# Altium PCB PCB1.PcbDoc
Units mm, origin at the board's own origin, x right, y up, seen from the top; angles counter-clockwise.
Board outline 122.05 x 129.79 mm, 2 copper layers (Top Layer, Bottom Layer); 66 components, 56 nets, 261 pads, 4 vias.
Unrouted connection lines stored in the file: 6.
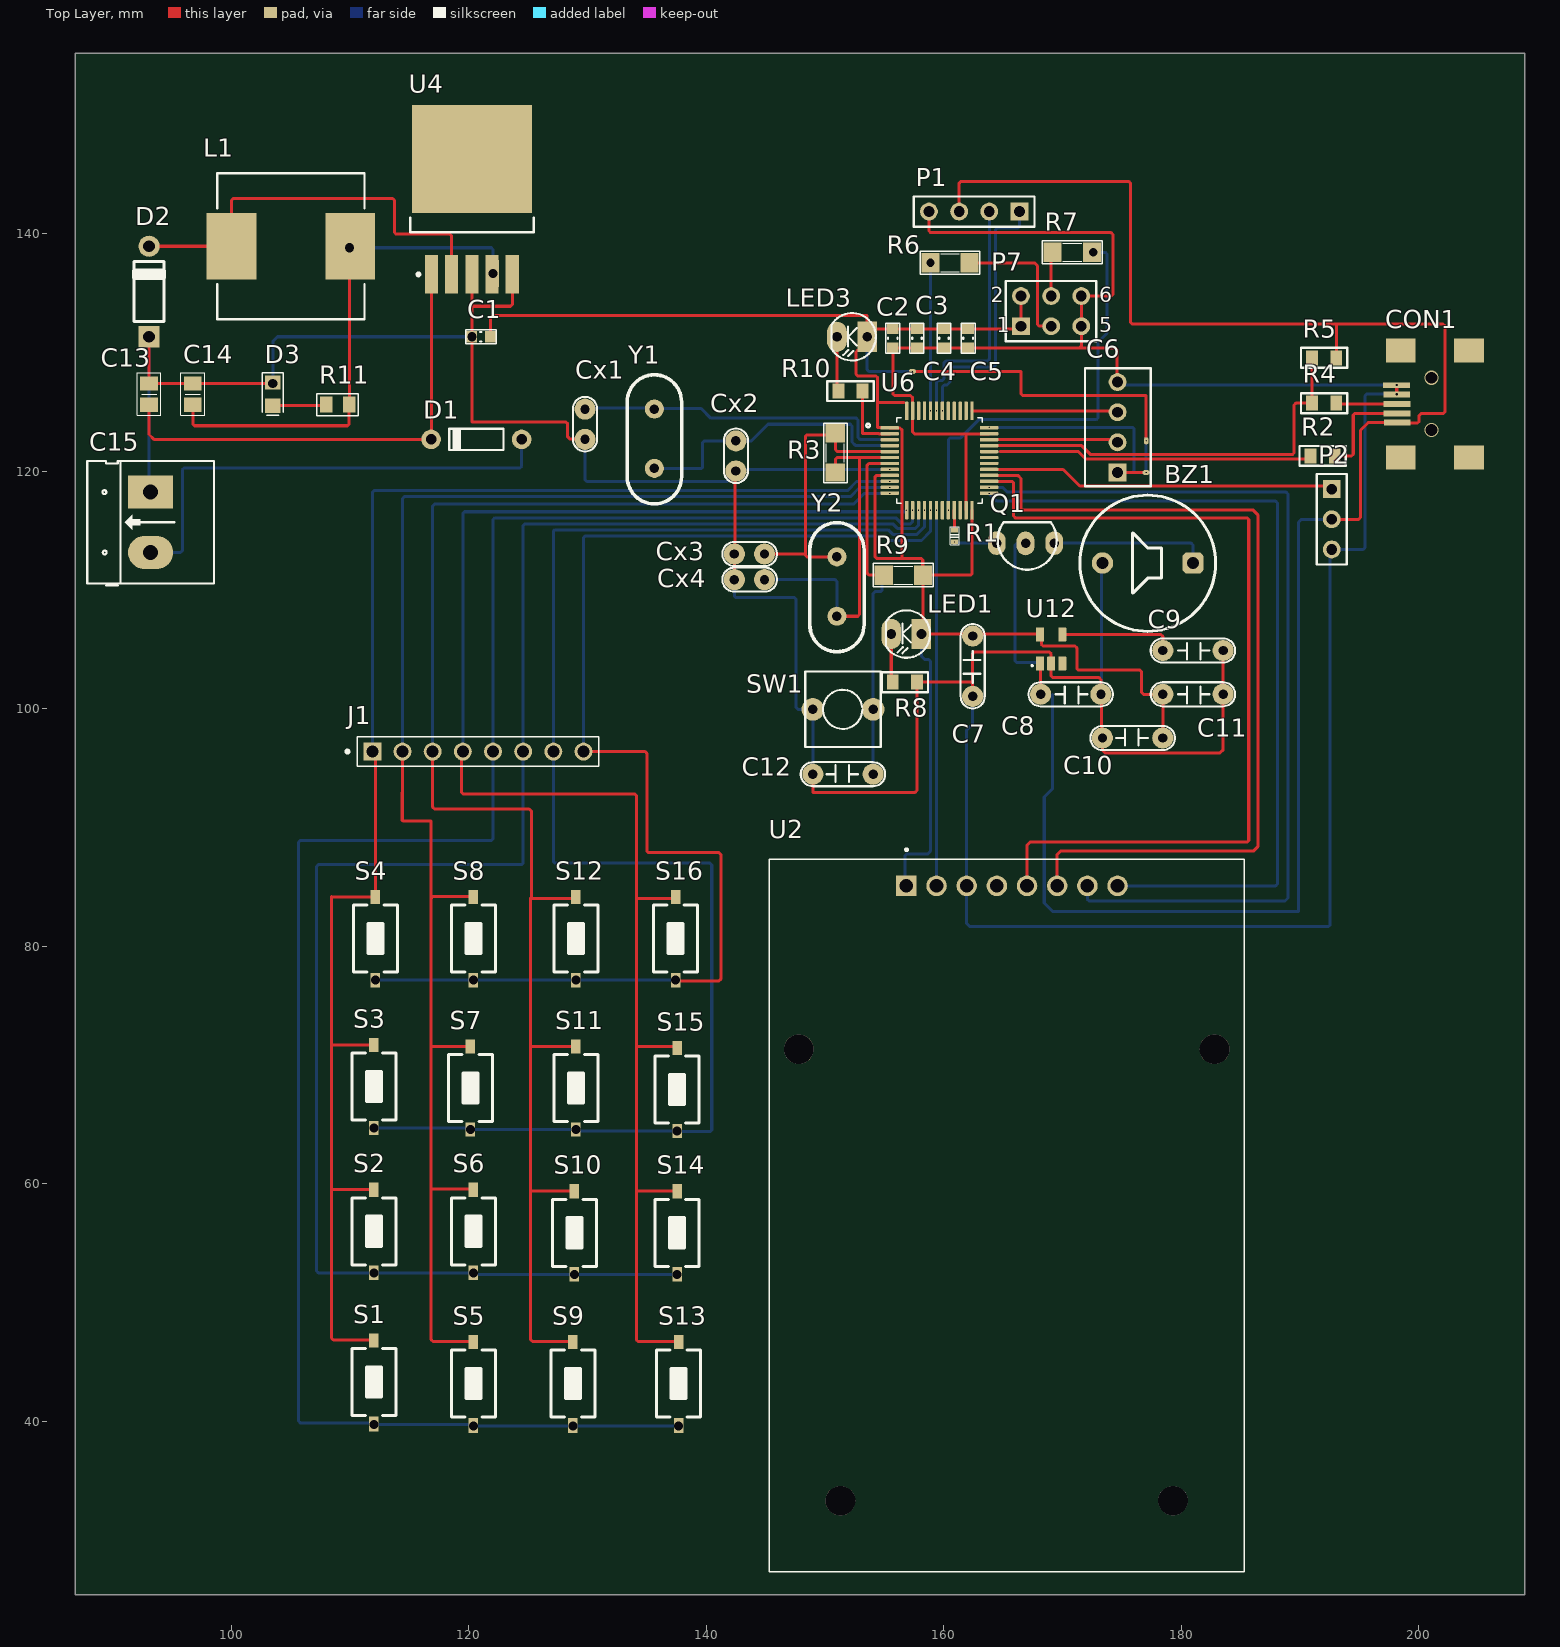
[diagram p0: Top Layer view]
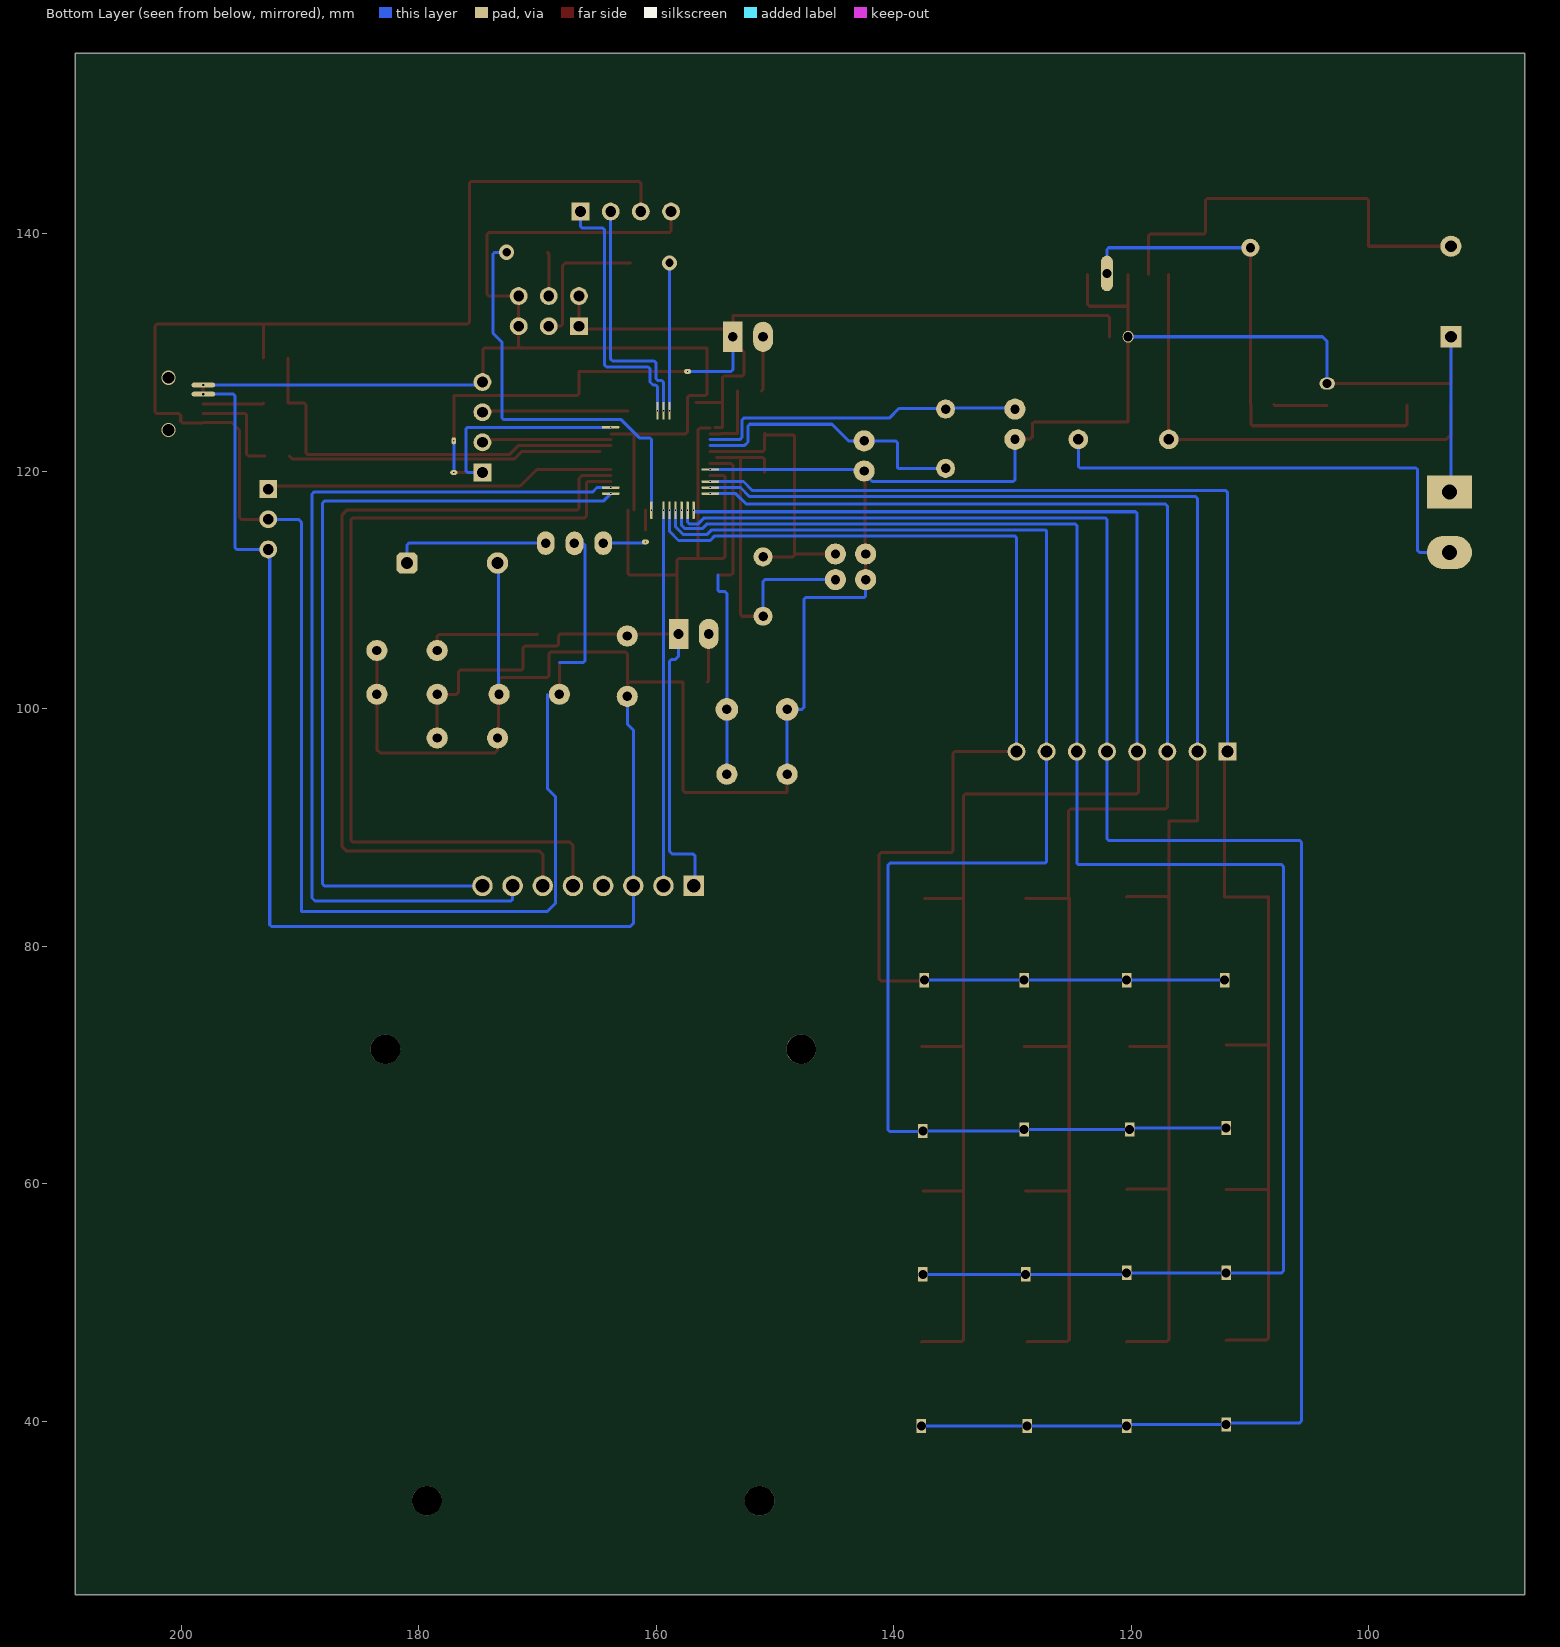
[diagram p1: Bottom Layer view, seen from below]

## Layer stack, top to bottom
Top Solder: solder mask 0.0102, Solder Resist, Dk 3.5
Top Layer: signal copper 0.0356
Dielectric 1: dielectric 0.32, FR-4, Dk 4.8
Bottom Layer: signal copper 0.0356
Bottom Solder: solder mask 0.0102, Solder Resist, Dk 3.5

## Board outline
86.868,25.4 208.915,25.4 208.915,155.194 86.868,155.194

## Design rules (kind name [scope] priority, off if disabled: settings)
Clearance [All] p1: gap=0.1 ignorepadtopadclearanceinfootprint=FALSE
PolygonConnect [All] p1: connectstyle=Relief reliefconductorwidth=0.254 reliefentries=4 polygonreliefangle="90 Angle" airgapwidth=0.254
RoutingVias [All] p1: holewidth=0.711 width=1.27 viastyle="Through Hole" minholewidth=0.711 minwidth=1.27 maxholewidth=0.711 maxwidth=1.27
SolderMaskExpansion [All] p1: expansion=0.102 istentingtop=FALSE
Width [All] p1: maxlimit=0.254 minlimit=0.254 preferedwidth=0.254
30 further rules are at their usual default settings.

## Components (designator, comment, footprint, x,y, rotation, side; value= is the part's Value field where it differs from the comment)
BZ1 "Buzzer" BUZZER 180.975,112.268 r180 top
C1 "C0603" CN-SMD-0603 121.031,131.318 r0 top value=100nF
C2 "C0603" CN-SMD-0603 155.702,131.191 r90 top value=100nF
C3 "C0603" CN-SMD-0603 157.734,131.191 r90 top value=100nF
C4 "C0603" CN-SMD-0603 160.02,131.191 r90 top value=100nF
C5 "C0603" CN-SMD-0603 162.052,131.191 r90 top value=100nF
C6 "SWD" HDR4 174.625,119.888 r90 top
C7 "104" CN2 162.433,101.044 r90 top value=0.1uF
C8 "105" CN2 173.228,101.219 r180 top value=0.1uF
C9 "22uF" CN2 183.515,104.902 r180 top value=0.1uF
C10 "104" CN2 173.355,97.536 r0 top value=0.1uF
C11 "105" CN2 183.515,101.219 r180 top value=0.1uF
C12 "105" CN2 148.971,94.488 r0 top value=0.1uF
C13 "100uF" "C 0805" 93.091,126.492 r90 top
C14 "1000uf" "C 0805" 96.774,126.492 r90 top
C15 "Header Vin" KF-128_2P 93.218,118.237 r270 top
CON1 "Micro USB" USB-B-Mini 198.476,125.662 r270 top value="USB Mini B"
Cx1 "22pF" CN1 129.794,122.682 r90 top value=33pF
Cx2 "22pF" CN1 142.494,120.015 r90 top value=33pF
Cx3 "22pF" CN1 142.367,113.03 r0 top value=33pF
Cx4 "22pF" CN1 142.367,110.871 r0 top value=33pF
D1 "SS34" "DO-35 (SOD27 )" 124.46,122.682 r180 top
D2 "1N5822" DO-41 93.091,131.318 r90 top
D3 "Led" "Led 0805 RED" 103.505,126.492 r90 top
J1 "HEADER_KEYPAD" TE_826629-8 111.887,96.393 r0 top
L1 "100uH" "Inductor SMD 12x12x8" 105.029,138.938 r0 top
LED1 "LED" LED-3 158.115,106.299 r180 top value="LED 3 ly Single Colour"
LED3 "LED" LED-3 153.543,131.318 r180 top value="LED 3 ly Single Colour"
P1 "Header I2C LCD" HDR1X4 166.37,141.859 r180 top
P2 "Header Servo" HDR1X3 192.659,118.491 r270 top
P7 "Header 3X2" HDR2X3 166.497,132.207 r0 top
Q1 "NPN" TRAN-LOWPOWER 167.017,114.07 r90 top
R1 "R0402" RES-SMD-0402 160.909,114.554 r90 top value=1K
R2 "R0603" "DIEN TRO 0805" 191.897,121.285 r0 top value=0603
R3 "10M" SM-1206 150.876,121.539 r270 top value="R1/4W - 1K"
R4 "R0603" "DIEN TRO 0805" 192.024,125.73 r0 top value=0603
R5 "R0603" "DIEN TRO 0805" 192.024,129.54 r180 top value=0603
R6 "100k" SM-1206 160.528,137.541 r0 top value="R1/4W - 1K"
R7 "100k" SM-1206 170.815,138.43 r0 top value="R1/4W - 1K"
R8 "R0603" "DIEN TRO 0805" 156.718,102.235 r0 top value=0603
R9 "10k" SM-1206 156.591,111.252 r0 top value="R1/4W - 1K"
R10 "R0603" "DIEN TRO 0805" 152.146,126.746 r0 top value=0603
R11 "1K" "R 0805" 108.966,125.603 r0 top
S1 "SW-SMD" SW-SMD 112.014,43.307 r270 top
S2 "SW-SMD" SW-SMD 112.014,56.007 r270 top
S3 "SW-SMD" SW-SMD 112.014,68.199 r270 top
S4 "SW-SMD" SW-SMD 112.141,80.645 r270 top
S5 "SW-SMD" SW-SMD 120.396,43.18 r270 top
S6 "SW-SMD" SW-SMD 120.396,56.007 r270 top
S7 "SW-SMD" SW-SMD 120.142,68.072 r270 top
S8 "SW-SMD" SW-SMD 120.396,80.645 r270 top
S9 "SW-SMD" SW-SMD 128.778,43.18 r270 top
S10 "SW-SMD" SW-SMD 128.905,55.88 r270 top
S11 "SW-SMD" SW-SMD 129.032,68.072 r270 top
S12 "SW-SMD" SW-SMD 129.032,80.645 r270 top
S13 "SW-SMD" SW-SMD 137.668,43.18 r270 top
S14 "SW-SMD" SW-SMD 137.541,55.88 r270 top
S15 "SW-SMD" SW-SMD 137.541,67.945 r270 top
S16 "SW-SMD" SW-SMD 137.414,80.645 r270 top
SW1 "SW" SW2 148.971,99.949 r0 top value="SW chip 2 pin"
U2 "RFID" MODULE_CEG006900 165.295,57.33 r0 top
U4 "LM2576HV" TO-263-5 120.269,142.875 r90 top
U6 "STM32F103C8T6" QFP50P900X900X160-48N 159.628,120.9 r0 top
U12 "RT9193-33GB" SOT94P279X129-5N 169.037,105.029 r90 top
Y1 "32.768K" xtal 135.636,122.682 r270 top
Y2 "8M" xtal 151.003,110.236 r270 top

## Footprints (in the part's own frame and the unit in brackets; to place one, negate y for a bottom-side part, rotate by r counter-clockwise, add the part's x,y. Pads: shape width x height; smd on the part's side, far side on the other; paste and mask are expansions set on the pad)
BUZZER [mm] "DC Buzzer 5V/12V"
  rrect50% 1.8x1.8 hole 1: 1(0,0)
  round 1.8 hole 1: 2(7.62,0)
  silkscreen extent -1.91,-5.71 9.53,5.75, body extent -5.64,-6 9.81,6, height 9.65
"C 0805" [mm] "Chip Capacitor, 2-Leads, Body 2.0x1.3mm, IPC Medium Density"
  rect 1.2x1.5 smd: 1(-0.9,0) 2(0.9,0)
  silkscreen extent -1.78,-1 1.78,1, body extent -1,-0.64 1,0.61, height 0.6
CN1 [mil]
  round 70 hole 31: 1(0,0) 2(100,0)
  silkscreen extent -40,-40 141,40, body extent -60,-30 170,37, height 265
CN2 [mil]
  round 70 hole 31: 1(0,0) 2(200,0)
  silkscreen extent -40,-40 240,40, body extent -54,-44 260,55, height 407
CN-SMD-0603 [mm]
  rect 0.9x1 smd: 1(-0.8,0) 2(0.8,0)
  silkscreen extent -1.27,-0.58 1.27,0.58, body extent -0.8,-0.4 0.8,0.4, height 0.3
"DIEN TRO 0805" [mm] "Chip Resistor; Body 2.0 x 1.3 mm (LxW typ)"
  rect 1x1.27 smd: 1(-1.016,0) 2(1.016,0)
  silkscreen extent -1.96,-0.84 1.96,0.84, body extent -1,-0.62 1,0.63, height 0.78
"DO-35 (SOD27 )" [mil]
  round 65 hole 34: 1(0,0) 2(300,0)
  silkscreen extent 60,-35 240,35, body extent -11,-38 311,38, height 78
DO-41 [mil]
  rect 70x70 hole 39.37: 1(0,0)
  round 70 hole 39.37: 2(300,0)
  silkscreen extent 50,-55 250,55, body extent -15,-47 315,47, height 99
HDR1X3 [mm] "Connector; Header; 3 Position"
  rect 1.5x1.5 hole 0.9: 1(0,0)
  round 1.5 hole 0.9: 2(2.54,0) 3(5.08,0)
  silkscreen extent -1.27,-1.27 6.35,1.27, body extent -1.27,-1.27 6.35,1.27, height 7
HDR1X4 [mm] "Connector; Header; 4 Position"
  rect 1.5x1.5 hole 0.9: 1(0,0)
  round 1.5 hole 0.9: 2(2.54,0) 3(5.08,0) 4(7.62,0)
  silkscreen extent -1.27,-1.27 8.89,1.27, body extent -1.27,-1.27 8.89,1.27, height 7
HDR2X3 [mm] "Connector; Header; 3x2 Position"
  rect 1.5x1.5 hole 0.9: 1(0,0)
  round 1.5 hole 0.9: 2(0,2.54) 3(2.54,0) 4(2.54,2.54) 5(5.08,0) 6(5.08,2.54)
  silkscreen extent -1.27,-1.27 6.35,3.81, body extent -1.27,-1.27 6.35,3.81, height 7
HDR4 [mm] "Connector; Header; 4 Position"
  rect 1.5x1.5 hole 0.9: 1(0,0)
  round 1.5 hole 0.9: 2(2.54,0) 3(5.08,0) 4(7.62,0)
  silkscreen extent -1.14,-2.79 8.76,2.74, body extent -1.27,-2.92 8.89,2.88, height 11.72
"Inductor SMD 12x12x8" [mm] "Precision Wire Wound Inductor, 2-Leads, Body 12.3x12.3mm, IPC Low Density"
  rect 4.2x5.6 smd: 1(-5,0) 2(5,0)
  silkscreen extent -6.2,-6.15 6.2,6.15, body extent -6.25,-6.25 6.25,6.25, height 8.01
KF-128_2P [mm]
  rect 2.794x3.8 hole 1.27: 1(0,0)
  oval 2.794x3.8 hole 1.27: 2(5.08,0)
  silkscreen extent -2.62,-5.33 7.87,5.33, body extent -2.56,-5.25 8.2,5.28, height 14.3
"Led 0805 RED" [mm] "Led SMD 0805"
  rect 1.2x1.3 smd: 1(-0.975,0) 2(0.975,0)
  silkscreen extent -1.78,-0.89 1.78,0.89, body extent -1.01,-0.63 1.01,0.62, height 1.1
LED-3 [mil] "LED 2 PIN, 3ly Only colour"
  rect 65x100 hole 32: 1(0,0)
  oval 65x100 hole 32: 2(100,0)
  silkscreen extent -29,-78 118,79, body extent -13,-75 125,75, height 217
MODULE_CEG006900 [mm]
  rect 1.725x1.725 / inner round 1.725 / far side rect 1.725x1.725 hole 1.15: 1(-8.45,27.76)
  round 1.725 hole 1.15: 2(-5.91,27.76) 3(-3.37,27.76) 4(-0.83,27.76) 5(1.71,27.76) 6(4.25,27.76) 7(6.79,27.76) 8(9.33,27.76)
  round 2.5 hole 2.5 unplated: ""(-17.5,14) ""(-14,-24) ""(14,-24) ""(17.5,14)
  silkscreen extent -20,-30 20,30.91
QFP50P900X900X160-48N [mm]
  rrect50% 1.56x0.28 smd: 1(-4.18,2.75) 2(-4.18,2.25) 3(-4.18,1.75) 4(-4.18,1.25) 5(-4.18,0.75) 6(-4.18,0.25) 7(-4.18,-0.25) 8(-4.18,-0.75) 9(-4.18,-1.25) 10(-4.18,-1.75) 11(-4.18,-2.25) 12(-4.18,-2.75) 25(4.18,-2.75) 26(4.18,-2.25) 27(4.18,-1.75) 28(4.18,-1.25) 29(4.18,-0.75) 30(4.18,-0.25) 31(4.18,0.25) 32(4.18,0.75) 33(4.18,1.25) 34(4.18,1.75) 35(4.18,2.25) 36(4.18,2.75)
  rrect50% 0.28x1.56 smd: 13(-2.75,-4.18) 14(-2.25,-4.18) 15(-1.75,-4.18) 16(-1.25,-4.18) 17(-0.75,-4.18) 18(-0.25,-4.18) 19(0.25,-4.18) 20(0.75,-4.18) 21(1.25,-4.18) 22(1.75,-4.18) 23(2.25,-4.18) 24(2.75,-4.18) 37(2.75,4.18) 38(2.25,4.18) 39(1.75,4.18) 40(1.25,4.18) 41(0.75,4.18) 42(0.25,4.18) 43(-0.25,4.18) 44(-0.75,4.18) 45(-1.25,4.18) 46(-1.75,4.18) 47(-2.25,4.18) 48(-2.75,4.18)
  silkscreen extent -6.15,-3.6 3.6,3.6, body extent -4.5,-4.5 4.5,4.5, height 1.6
"R 0805" [mm] "Chip Resistor, 2-Leads, Body 2.0x1.3mm, IPC Medium Density"
  rect 1.05x1.35 smd: 1(-0.975,0) 2(0.975,0)
  silkscreen extent -1.75,-0.92 1.75,0.92, body extent -1,-0.61 1,0.59, height 0.5
RES-SMD-0402 [mm]
  rect 0.4x0.6 smd: 1(-0.5,0) 2(0.5,0)
  silkscreen extent -0.76,-0.38 0.76,0.38, body extent -0.5,-0.25 0.5,0.25, height 0.35
SM-1206 [mil] "Compoment SMD 120x60mil"
  rect 60x65 smd: 1(-65,0) 2(65,0)
  silkscreen extent -99,-38 99,39, body extent -83,-35 83,36, height 25
SOT94P279X129-5N [mm]
  rrect12% 1.17x0.67 smd: 1(-1.22,0.94) 2(-1.22,0) 3(-1.22,-0.94) 4(1.22,-0.94) 5(1.22,0.94)
  silkscreen extent -1.47,1.53 -1.33,1.67, body extent -1.4,-1.45 1.4,1.45, height 1.3
SW2 [mil] "SW button 2pin, 250x 250 mil"
  round 75 hole 31: 1(0,0) 2(200,0)
  silkscreen extent -25,-125 225,125
SW-SMD [mm] "Switch SMD type"
  rect 1.2x0.8 smd: 1(-3.5,0) 2(3.5,0)
  silkscreen extent -2.82,-1.85 2.82,1.85, body extent -3.05,-1.85 3.05,1.85, height 2.5
TE_826629-8 [mm]
  rect 1.508x1.508 / inner round 1.508 / far side rect 1.508x1.508 hole 1: 1(0,0)
  round 1.508 hole 1: 2(2.54,0) 3(5.08,0) 4(7.62,0) 5(10.16,0) 6(12.7,0) 7(15.24,0) 8(17.78,0)
  silkscreen extent -2.2,-1.25 19.05,1.25, body extent -1.14,-1.25 19.18,1.25, height 9.62
TO-263-5 [mm] "D2-PAK, 6-Pads, Body 8.9x10.4mm (max), IPC Medium Density"
  rect 3.25x1.1 smd: 1(-6.3,3.4) 2(-6.3,1.7) 3(-6.3,0) 4(-6.3,-1.7) 5(-6.3,-3.4)
  rect 9.1x10.1 smd: 6(3.4,0)
  silkscreen extent -6.42,-5.2 -1.55,5.2, body extent -7.56,-4.98 8.11,5.02, height 4.83
TRAN-LOWPOWER [mm] "TO, Flat Index; 3 In-Line, Axial Leads; Body Dia. 4.5mm; Leads 0.51 x 0.48 mm (max)"
  oval 2x1.5 hole 0.8: 1(-0.127,-2.286) 2(-0.151,0.139) 3(-0.127,2.564)
  silkscreen extent -2.35,-2.48 1.63,2.48, body extent -2.48,-2.79 1.52,3.01, height 11
USB-B-Mini [mm]
  rect 2x2.5 smd: 0(-4.5,0) 0(-4.496,5.74) 0(4.5,0) 0(4.504,5.74)
  rect 0.5x2.25 smd: 1(1.575,-0.305) 2(0.787,-0.317) 3(0,-0.33) 4(-0.787,-0.343) 5(-1.575,-0.356)
  body extent -5.35,-0.67 5.35,8.53, height 3.95
xtal [mm]
  round 1.6 hole 0.8: 1(-2.552,0.001) 2(2.448,0.001)
  silkscreen extent -5.44,-2.29 5.44,2.29, body extent -5.55,-2.32 5.62,2.35, height 3.63

## Part data
C1 C2 C3 C4 C5: library part CAP-SMD-0603, "Cap SMD"
C6: library part Header4, "Header IDC, 4 x 1 Pin Vertical 2.54mm Pitch (Non-Boxed, Male)", Manufacturer="W¨¹rth Elektronik eiSos GmbH", partNo=613002143121, ComponentLink1 Description=Manufacturer, ComponentLink1URL=http://www.we-online.com, ComponentLink2 Description=Datasheet, ComponentLink2URL=http://katalog.we-online.de/em/datasheet/6130xx143121.pdf, Created by="Karrer Zheng", Created Date="29 March 2013", NoPins=02
C7 C8 C9 C10 C11 C12: library part CN2, "Cap np 104 => 105pF"
C13 C14: library part "Capacitor NP", "Capacitor non-pol"
C15: library part Header2, "Header IDC, 2 x 1 Pin Vertical 2.54mm Pitch (Non-Boxed, Male)", Manufacturer="W¨¹rth Elektronik eiSos GmbH", partNo=613002143121, ComponentLink1 Description=Manufacturer, ComponentLink1URL=http://www.we-online.com, ComponentLink2 Description=Datasheet, ComponentLink2URL=http://katalog.we-online.de/em/datasheet/6130xx143121.pdf, Created by="Karrer Zheng", Created Date="29 March 2013", NoPins=02
CON1: library part "USB Mini B"
Cx1 Cx2 Cx3 Cx4: library part CAP-DIP, "Cremic For Xtal 1pF => 100pF"
D1: library part Diode, "Default Diode"
D2: library part "Diode Schottky", "Schottky Diode"
D3: "Typical LED"
J1: library part 826629-8, "Conn Unshrouded Header HDR 8 POS 2.54mm Solder ST Thru-Hole Automotive Box", PACKAGE=None, Availability="In Stock", Check_prices=https://www.snapeda.com/parts/826629-8/TE+Connectivity+AMP+Connectors/view-part/?ref=eda, EU_RoHS_Compliance=Compliant, MF="TE Connectivity", MP=826629-8, Price=None, Purchase-URL=https://pricing.snapeda.com/search/part/826629-8/?ref=eda, SnapEDA_Link=https://www.snapeda.com/parts/826629-8/TE+Connectivity+AMP+Connectors/view-part/?ref=snap
L1: library part Inductor, "Inductor"
LED1 LED3: "LED Single colour Green and Red"
P1: library part "Header 4", "Header, 4-Pin", LatestRevisionDate=17-Jul-2002, LatestRevisionNote="Re-released for DXP Platform.", Publisher="Altium Limited"
P2: library part "Header 3", "Header, 3-Pin", LatestRevisionDate=17-Jul-2002, LatestRevisionNote="Re-released for DXP Platform.", Publisher="Altium Limited"
P7: "Header, 3-Pin, Dual row", LatestRevisionDate=17-Jul-2002, LatestRevisionNote="Re-released for DXP Platform.", Publisher="Altium Limited"
Q1: "NPN General", PackageDocument=Sep-1998, Code_JEDEC=TO-92A, ComponentLink1Description="Manufacturer Link", ComponentLink1URL=http://www.fairchildsemi.com/, ComponentLink2Description=Datasheet, ComponentLink2URL=http://www.fairchildsemi.com/ds/2N%2F2N3904.pdf, DatasheetDocument=1997, LatestRevisionDate=15-Jan-2003, LatestRevisionNote="PCB Footprint 'BCY-W3/D4.7' replaced", PackageReference=TO-92A, Published=8-Jun-2000, Publisher="Altium Limited"
R1: library part Res-SMD-0402, "Resistor", Manufacturer="Generic Components", Class=Passive, Published=08/06/2000, Publisher="Altium Hobart Technology Centre"
R2 R4 R5 R8 R10: "Resistor SMD 0603", LatestRevisionDate=17-Jul-2002, LatestRevisionNote="Re-released for DXP Platform.", PackageReference=AXIAL-0.4, Published=8-Jun-2000, Publisher="Altium Limited"
R3 R6 R7 R9: library part R, "Resistor 1/4W"
R11: library part Resistor, "Resistor"
S1 S2 S3 S4 S5 S6 S7 S8 S9 S10 S11 S12 S13 S14 S15 S16: "Switch", LatestRevisionDate=17-Jul-2002, LatestRevisionNote="Re-released for DXP Platform.", PackageReference=SPST-2, Published=24-Mar-1999, Publisher="Altium Limited"
SW1: library part SW2, "Switch button 2 pin"
U2: library part CEG006900, "RFID RC522 Reader IC Card Module Tags SPI Interface Read and Write", PACKAGE=None, Availability="Not in stock", Check_prices=https://www.snapeda.com/parts/CEG006900/YKS/view-part/?ref=eda, MF=YKS, MP=CEG006900, Price=None, SnapEDA_Link=https://www.snapeda.com/parts/CEG006900/YKS/view-part/?ref=snap
U4: library part LM2596S-5.0, "Simple Switcher 3A Step-Down Voltage Regulator"
U6: "ARM® Cortex®-M3 STM32F1 Microcontroller IC 32-Bit 72MHz 64KB (64K x 8) FLASH 48-LQFP (7x7)", PACKAGE="LQFP-48 STMicroelectronics", Check_prices=https://www.snapeda.com/parts/STM32F103C8T6/STMicroelectronics/view-part/?ref=eda, MF=STMicroelectronics, MP=STM32F103C8T6, SnapEDA_Link=https://www.snapeda.com/parts/STM32F103C8T6/STMicroelectronics/view-part/?ref=snap
U12: "Linear Voltage Regulator IC Positive Fixed 1 Output 300mA TSOT-23-5", PACKAGE="SOT-23-5 Richtek", Check_prices=https://www.snapeda.com/parts/RT9193-33GB/Richtek+USA+Inc./view-part/?ref=eda, Digi-Key_Part_Number=1028-1014-2-ND, MF="Richtek USA", MP=RT9193-33GB, Purchase-URL=https://pricing.snapeda.com/search/part/RT9193-33GB/?ref=eda, SnapEDA_Link=https://www.snapeda.com/parts/RT9193-33GB/Richtek+USA+Inc./view-part/?ref=snap
Y1 Y2: library part "Crystal 2p", "Crystal Oscillator", LatestRevisionDate=17-Jul-2002, LatestRevisionNote="Re-released for DXP Platform.", PackageReference=R38, Published=8-Jun-2000, Publisher="Altium Limited"

## Free pads (board coordinates)
  rect 0.8x1.2 hole 0.762: 3(112.014,39.751) 3(112.014,52.507) 3(112.014,64.699) 3(112.141,77.145) 3(120.142,64.572) 3(120.396,39.624) 3(120.396,52.507) 3(120.396,77.145) 3(128.778,39.624) 3(128.905,52.38) 3(129.032,64.572) 3(129.032,77.145) 3(137.414,77.145) 3(137.541,52.38) 3(137.541,64.445) 3(137.668,39.624)
  oval 2x0.4 hole 0.2: 4(198.12,126.492) 4(198.12,127.254)
  round 1.524 hole 0.762: 5(109.982,138.811)
  oval 1x3 hole 0.762: 5(122.047,136.652)
  oval 1.3x1 hole 0.762: 7(103.505,127.381)
  oval 0.9x1 hole 0.762: 7(120.269,131.318)
  oval 0.6x0.4 hole 0.1: 7(157.353,128.397) 7(160.909,114.046) 7(177.038,119.888)
  oval 0.4x0.6 hole 0.1: 7(177.038,122.555)
  oval 1.5x0.2 hole 0.1: c(155.448,118.11) c(155.448,118.618) c(155.448,119.126) c(155.448,120.142) c(163.83,118.11) c(163.83,118.618) c(163.83,123.698)
  oval 0.2x1.5 hole 0.1: c(156.845,116.713) c(157.353,116.713) c(157.861,116.713) c(158.369,116.713) c(158.877,116.713) c(158.877,125.095) c(159.385,116.713) c(159.385,125.095) c(159.893,125.095) c(160.401,116.713)

## Via types
v1: diameter 1.2, hole 1, Top Layer to Bottom Layer, 2 vias
v2: diameter 1.27, hole 0.711, Top Layer to Bottom Layer, 2 vias

## Nets (pads, with @x,y where several pads share a name; then routed paths per layer and width w, separated by ;. In a path a pad name is that pad's centre, name@x,y a point inside that pad or via, vN(x,y) a via of type N, cw(c..) or ccw(c..) an arc to the next point about the centre after c; other vN are vias at no path point)
3.3V: C14.1 L1.2 pad.5 R11.2 U4.4 | length 43.9
  Top Layer w0.254: C14.1 96.774,123.974 96.923,123.825 109.792,123.825 109.941,123.974 R11.2 109.982,125.644 pad.5@109.982,138.811
  Bottom Layer w0.254: pad.5@109.982,138.811 121.898,138.811 122.047,138.662 pad.5@122.047,136.652
3V3: C1.2 C2.2 C3.2 C4.2 C5.2 C6.1 C7.2 C10.2 C11.2 LED1.1 LED3.1 P7.1 P7.2 pad.7@157.353,128.397 pad.7@177.038,119.888 pad.7@177.038,122.555 pad.c@163.83,123.698 R9.2 U2.1 U6.1 U6.9 U6.24 U6.36 U6.48 U12.5 | length 210
  Top Layer w0.254: C1.2 121.831,132.947 121.98,133.096 153.543,133.096 LED3.1 ; U6.1@155.067,123.671 154.84,123.671 154.813,123.698 154.432,123.698 154.432,125.783 ; U6.9 154.343,119.65 154.194,119.501 154.194,112.814 154.343,112.665 156.464,112.665 ; U6.1 155.461,123.637 156.315,123.637 156.464,123.488 156.464,112.665 ; 156.665,125.783 154.432,125.783 ; pad.7@157.353,128.397 166.497,128.397 166.497,126.514 166.646,126.365 177.038,126.365 pad.7@177.038,122.682 ; R9.2@158.226,111.363 158.226,112.516 158.077,112.665 156.464,112.665 ; U6.24 162.378,111.346 162.284,111.252 R9.2 158.242,106.426 LED1.1 168.147,106.299 U12.5 168.207,106.139 168.207,105.432 168.356,105.283 171.047,105.283 171.196,105.134 171.196,103.4 171.345,103.251 176.508,103.251 176.657,103.102 176.657,101.368 176.806,101.219 C11.2 C10.2 ; P7.2 P7.1 166.281,131.991 C5.2 C4.2 C3.2 C2.2 154.216,131.991 LED3.1 ; C6.1 pad.7@177.038,119.888 ; LED3.1 153.543,130.874 152.844,130.175 152.751,130.175 152.602,130.026 152.602,128.165 152.751,128.016 154.283,128.016 154.432,127.867 154.432,125.783
  Bottom Layer w0.254: LED3.1 153.543,128.546 153.692,128.397 pad.7@157.353,128.397 ; U2.1 156.718,85.217 156.718,87.608 156.867,87.757 158.623,87.757 158.877,88.011 158.877,103.991 158.728,104.14 158.391,104.14 158.115,104.416 LED1.1 ; pad.c@163.83,123.698 175.873,123.698 176.022,123.549 176.022,120.037 175.873,119.888 C6.1 ; pad.7@177.038,119.888 pad.7@177.038,122.555
5V: C8.2 CON1.1 P1.3 P2.2 Q1.2 R5.1 U12.1 U12.3 | length 174
  Top Layer w0.254: P1.3 161.29,144.25 161.439,144.399 175.567,144.399 175.715,144.25 175.715,132.535 175.864,132.387 193.114,132.387 ; U12.1 168.122,103.784 C8.2@168.122,101.245 ; P2.2 194.923,115.951 195.072,116.1 195.072,123.444 195.715,124.087 CON1.1 198.192,124.067 199.653,124.067 199.665,124.054 199.876,124.054 200.025,124.203 200.025,124.692 200.174,124.841 202.035,124.841 202.184,124.99 202.184,132.238 202.035,132.387 193.114,132.387 ; R5.1 193.04,132.312 193.114,132.387
  Bottom Layer w0.254: Q1.2 166.138,113.919 165.989,113.77 165.989,104.035 166.138,103.886 168.148,103.886 ; 169.164,101.219 169.164,93.283 168.456,92.575 168.456,83.639 169.164,82.931 189.865,82.931 189.865,115.697 190.119,115.951 P2.2
BOOT0: pad.c@158.877,125.095 R6.1 U6.44 | length 12.3
  Top Layer w0.254: U6.44 U6.44
  Bottom Layer w0.254: pad.c@158.877,125.222 v2(158.877,137.541)
BOOT1: pad.c@160.401,116.713 R7.2 U6.20 | length 34.6
  Bottom Layer w0.254: pad.c@160.401,116.713 160.401,122.66 160.55,122.809 161.417,122.809 162.941,124.333 172.825,124.333 172.974,124.482 172.974,130.863 173.736,131.625 173.736,138.281 173.587,138.43 v2(172.593,138.43)
BUZZER: R1.2 U6.21 | length 1.7
  Top Layer w0.254: U6.21 160.878,116.08 160.909,116.049 R1.2
COL0: J1.5 pad.3@112.014,39.751 pad.3@120.396,39.624 pad.3@128.778,39.624 pad.3@137.668,39.624 pad.c@157.353,116.713 S1.2 S5.2 S9.2 S13.2 U6.14 | length 160.9
  Bottom Layer w0.254: pad.3@137.668,39.624 128.778,39.624 120.396,39.624 120.269,39.751 112.014,39.751 111.887,39.878 105.813,39.878 105.664,40.027 105.664,88.751 105.813,88.9 121.898,88.9 122.047,89.049 J1.5 122.047,115.929 122.196,116.078 155.956,116.078 156.464,115.57 157.204,115.57 157.353,115.719 pad.c@157.353,116.713
COL1: J1.6 pad.3@112.014,52.507 pad.3@120.396,52.507 pad.3@128.905,52.38 pad.3@137.541,52.38 pad.c@157.861,116.713 S2.2 S6.2 S10.2 S14.2 U6.15 | length 145.3
  Bottom Layer w0.254: pad.3@137.541,52.38 128.905,52.38 120.523,52.38 120.396,52.507 107.337,52.507 107.188,52.656 107.188,86.719 107.337,86.868 124.438,86.868 124.587,87.017 J1.6 124.587,115.421 124.736,115.57 155.702,115.57 156.083,115.189 157.607,115.189 157.861,115.443 pad.c@157.861,116.713
COL2: J1.7 pad.3@112.014,64.699 pad.3@120.142,64.572 pad.3@129.032,64.572 pad.3@137.541,64.445 pad.c@158.369,116.713 S3.2 S7.2 S11.2 S15.2 U6.16 | length 125.3
  Bottom Layer w0.254: pad.3@112.014,64.699 120.015,64.699 120.142,64.572 129.032,64.572 129.159,64.445 137.541,64.445 137.597,64.389 140.313,64.389 140.462,64.538 140.462,86.846 140.313,86.995 127.276,86.995 127.127,87.144 J1.7 127.127,114.935 127.254,115.062 155.321,115.062 155.702,114.681 157.734,114.681 158.369,115.316 pad.c@158.369,116.713
COL3: J1.8 pad.3@112.141,77.145 pad.3@120.396,77.145 pad.3@129.032,77.145 pad.3@137.414,77.145 pad.c@158.877,116.713 S4.2 S8.2 S12.2 S16.2 U6.17 | length 109.2
  Top Layer w0.254: J1.8 134.852,96.393 135.001,96.244 135.001,88.033 135.15,87.884 141.075,87.884 141.224,87.735 141.224,77.238 141.075,77.089 137.47,77.089 S16.2
  Bottom Layer w0.254: pad.3@112.141,77.145 120.396,77.145 129.032,77.145 pad.3@137.414,77.145 ; J1.8 129.667,114.405 129.816,114.554 130.429,114.554 155.067,114.554 155.448,114.173 158.115,114.173 158.877,114.935 pad.c@158.877,116.713
GND: BZ1.2 C1.1 C2.1 C3.1 C4.1 C5.1 C6.4 C7.1 C8.1 C9.1 C10.1 C11.1 C12.1 C13.2 C14.2 C15.1 CON1.4 CON1.5 Cx1.1 Cx2.1 Cx3.1 Cx4.1 D2.1 D3.2 P1.4 P2.3 P7.5 P7.6 pad.4 pad.7@103.505,127.381 pad.7@120.269,131.318 pad.c@155.448,120.142 R8.2 SW1.1 U2.3 U4.3 U4.5 U6.8 U6.23 U6.35 U6.47 U12.2 | length 413.4
  Top Layer w0.254: D2.1 C13.2 C14.2 103.43,127.392 D3.2 ; C1.1 120.269,131.356 120.269,133.966 ; pad.7@120.269,131.318 120.269,124.146 128.181,124.146 128.33,123.997 128.33,122.891 128.524,122.697 129.779,122.697 Cx1.1 ; U4.3 120.269,133.966 ; U4.5 123.669,134.036 123.52,133.887 120.347,133.887 120.269,133.966 ; Cx4.1 Cx3.1 142.43,113.093 142.43,119.951 Cx2.1 Cx2.1@142.621,120.142 ; C12.1 148.971,92.964 157.585,92.964 157.734,93.113 R8.2 162.284,102.235 162.433,102.086 ; P1.4 158.75,140.23 158.899,140.081 174.095,140.081 174.244,139.932 174.244,134.896 174.095,134.747 P7.6 P7.5 171.577,130.54 171.428,130.391 ; U6.23 161.878,123.103 161.925,123.15 ; C7.1@162.433,101.219 162.433,102.086 ; U6.35 161.925,123.15 ; C6.4 174.587,127.546 174.587,130.242 174.438,130.391 171.428,130.391 ; C9.1 C11.1 183.515,96.542 183.239,96.266 173.587,96.266 173.355,96.498 C10.1 173.291,97.599 173.291,101.155 C8.1 173.228,102.467 173.079,102.616 169.186,102.616 169.037,102.765 U12.2 169.037,104.626 168.888,104.775 162.582,104.775 162.433,104.626 162.433,102.086 ; CON1.5 198.133,127.224 CON1.4 ; 161.925,123.15 157.527,123.15 157.378,123.299 U6.47 157.378,126.191 157.204,126.365 155.851,126.365 155.702,126.514 C2.1 C3.1 C4.1 C5.1 171.428,130.391
  Bottom Layer w0.254: D2.1 93.091,118.364 C15.1 ; pad.7@103.505,127.381 103.505,130.915 103.908,131.318 pad.7@120.269,131.318 ; Cx1.1@129.794,122.635 129.794,119.275 129.943,119.126 141.797,119.126 142.494,119.823 Cx2.1 142.621,120.142 152.516,120.142 ; Cx4.1 142.367,109.496 142.516,109.347 147.425,109.347 147.574,109.198 147.574,100.098 147.723,99.949 SW1.1 C12.1 ; 152.549,120.142 pad.c@155.448,120.142 ; C7.1@162.433,101.25 C7.1 162.433,98.71 161.925,98.202 U2.3 161.925,81.915 162.179,81.661 192.383,81.661 192.532,81.81 P2.3@192.532,113.411 ; C8.1 173.291,101.282 173.291,112.204 BZ1.2 ; C6.4 174.625,127.254 174.641,127.27 175.201,127.27 175.216,127.254 pad.4@198.12,127.254 ; C9.1@183.366,105.41 183.441,105.336 183.515,105.261 C9.1 ; P2.3 195.304,113.411 195.453,113.56 195.453,126.343 195.602,126.492 pad.4@198.12,126.492
MISO: U2.5 U6.27 | length 74.1
  Top Layer w0.254: U6.27 165.737,119.15 165.86,119.027 165.86,116.225 166.009,116.076 185.523,116.076 185.672,115.927 185.672,88.92 185.523,88.771 167.257,88.771 167.005,88.519 U2.5
MOSI: U2.6 U6.28 | length 73.2
  Top Layer w0.254: U6.28 166.227,119.65 166.497,119.38 166.497,116.862 166.646,116.713 186.055,116.713 186.436,116.332 186.436,88.392 186.055,88.011 169.821,88.011 169.545,87.735 U2.6
NetBZ1_1: BZ1.1 Q1.1 | length 13.3
  Bottom Layer w0.254: Q1.1 180.826,113.943 180.975,113.794 BZ1.1
NetC9_2: C9.2 U12.4 | length 9.8
  Top Layer w0.254: U12.4@170.027,106.299 U12.4 178.286,106.249 178.435,106.1 C9.2
NetC13_1: C13.1 D1.2 U4.1 | length 40.4
  Top Layer w0.254: C13.1 93.091,123.085 93.494,122.682 D1.2 116.869,122.653 U4.1
NetC15_2: C15.2 D1.1 | length 40.5
  Bottom Layer w0.254: C15.2 95.736,113.157 95.885,113.306 95.885,120.12 96.034,120.269 124.311,120.269 124.46,120.418 D1.1
NetCON1_2: CON1.2 R2.2 | length 8.6
  Top Layer w0.254: R2.2@192.948,121.285 194.322,121.285 194.471,121.434 194.471,124.726 194.62,124.875 CON1.2
NetCON1_3: CON1.3 R4.2 | length 5.1
  Top Layer w0.254: R4.2 193.108,125.662 CON1.3
NetD2_2: D2.2 L1.1 U4.2 | length 35.5
  Top Layer w0.254: D2.2 L1.1 100.029,142.806 100.178,142.955 113.596,142.955 113.745,142.806 113.745,140.103 113.894,139.954 118.42,139.954 118.569,139.805 U4.2
NetD3_1: D3.1 R11.1 | length 4.5
  Top Layer w0.254: D3.1 107.905,125.517 R11.1
NetLED1_2: LED1.2 R8.1 | length 4.1
  Top Layer w0.254: LED1.2 155.575,102.362 R8.1
NetLED3_2: LED3.2 R10.1 | length 4.6
  Top Layer w0.254: LED3.2 151.003,126.873 R10.1
NetP7_3: P7.3 R6.2 | length 12
  Top Layer w0.254: R6.2 167.64,137.541 167.894,137.287 167.894,132.356 168.043,132.207 P7.3
NetP7_4: P7.4 R7.1 | length 3.7
  Top Layer w0.254: P7.4 169.037,138.303 R7.1
NetQ1_3: pad.7@160.909,114.046 Q1.3 R1.1 | length 3.6
  Bottom Layer w0.254: pad.7@160.909,114.046 161.012,113.943 Q1.3
NRST: C12.2 R9.1 SW1.2 U6.7 | length 29.8
  Top Layer w0.254: R9.1@154.813,111.252 153.692,111.252 153.543,111.401 153.543,120.501 153.692,120.65 U6.7
  Bottom Layer w0.254: C12.2 SW1.2 154.051,109.706 154.2,109.855 154.664,109.855 154.813,110.004 154.813,111.252
OSCIN: Cx3.2 R3.1 U6.5 Y2.1 | length 24.7
  Top Layer w0.254: Cx3.2 148.243,113.03 148.336,112.937 ; R3.1@150.876,123.063 150.876,121.815 151.025,121.666 155.432,121.666 U6.5 ; R3.1 150.749,123.063 148.485,123.063 148.336,122.914 148.336,113.03 148.336,112.937 ; Y2.1 148.485,112.788 148.336,112.937
OSCOUT: Cx4.2 R3.2 U6.6 Y2.2 | length 29.5
  Top Layer w0.254: R3.2 150.876,121.009 151.025,121.158 152.908,121.158 ; Y2.2 152.759,107.788 152.908,107.937 152.908,121.158 ; U6.6@154.94,121.158 152.908,121.158
  Bottom Layer w0.254: Cx4.2 150.855,110.871 151.004,110.722 Y2.2
PA9: U6.30
PA10: U6.31
PA11: R2.1 U6.32 | length 26.5
  Top Layer w0.254: 164.726,121.65 164.742,121.666 171.323,121.666 171.958,121.031 190.627,121.031 R2.1
PA12: R4.1 R5.2 U6.33 | length 35.5
  Top Layer w0.254: U6.33 171.601,122.15 172.366,121.385 189.335,121.385 189.484,121.534 189.484,125.581 189.633,125.73 R4.1 R5.2
PA15: U6.38
PB1: U6.19
PB3: U6.39
PB4: U6.40
PB5: U6.41
PB8: U6.45
PB9: U6.46
PB11: U6.22
PC13: R10.2 U6.2 | length 5.9
  Top Layer w0.254: R10.2 153.162,123.19 154.49,123.19 154.53,123.15 154.94,123.15 U6.2
PC14: Cx1.2 U6.3 Y1.1 | length 27.6
  Bottom Layer w0.254: Cx1.2@129.794,125.309 Y1.1@135.637,125.309 ; Y1.1 135.672,125.269 139.573,125.269 140.382,124.46 152.632,124.46 152.781,124.311 152.781,122.831 152.93,122.682 155.448,122.682
PC15: Cx2.2 U6.4 Y1.2 | length 24.1
  Bottom Layer w0.254: Y1.2 139.608,120.234 139.7,120.326 139.7,122.406 139.849,122.555 Cx2.2 143.808,122.555 145.205,123.952 152.124,123.952 152.273,123.803 152.273,122.45 152.549,122.174 155.448,122.174
PWM: P2.1 U6.29 | length 29.5
  Top Layer w0.254: U6.29 170.047,120.15 171.452,118.745 192.405,118.745 P2.1
ROW0: J1.1 pad.c@155.448,119.126 S1.1 S2.1 S3.1 S4.1 U6.10 | length 129.8
  Top Layer w0.254: J1.1 112.141,96.139 S4.1 108.514,84.145 108.458,84.201 108.458,71.628 ; S1.1 111.958,46.863 108.607,46.863 108.458,47.012 108.458,59.436 ; S2.1 108.529,59.507 108.458,59.436 ; S3.1 108.529,71.699 108.458,71.628 ; 108.458,59.436 108.458,71.628
  Bottom Layer w0.254: J1.1 111.887,118.215 112.036,118.364 151.892,118.364 152.654,119.126 pad.c@155.448,119.126
ROW1: J1.2 pad.c@155.448,118.618 S5.1 S6.1 S7.1 S8.1 U6.11 | length 128.8
  Top Layer w0.254: J1.2 114.427,92.964 114.405,92.942 114.405,90.595 114.449,90.551 116.84,90.551 116.84,84.052 ; S7.1 116.911,71.572 116.84,71.501 ; S5.1 120.34,46.736 116.989,46.736 116.84,46.885 116.84,59.563 ; S6.1 120.34,59.563 116.84,59.563 ; S8.1 120.34,84.201 116.989,84.201 116.84,84.052 ; 116.84,59.563 116.84,71.501 ; 116.84,71.501 116.84,84.052
  Bottom Layer w0.254: J1.2 114.427,117.707 114.576,117.856 152.146,117.856 152.908,118.618 pad.c@155.448,118.618
ROW2: J1.3 pad.c@155.448,118.11 S9.1 S10.1 S11.1 S12.1 U6.12 | length 132.2
  Top Layer w0.254: J1.3 116.967,91.716 117.116,91.567 125.095,91.567 125.278,91.384 125.278,84.018 ; S9.1 128.722,46.736 125.371,46.736 125.222,46.885 125.222,59.309 ; S10.1 125.293,59.38 125.222,59.309 ; S12.1@128.905,84.018 125.278,84.018 ; S11.1 125.293,71.572 125.222,71.501 ; 125.222,59.309 125.222,71.501 ; 125.222,71.501 125.222,84.074 125.278,84.018
  Bottom Layer w0.254: J1.3 116.967,117.072 117.116,117.221 152.4,117.221 153.289,118.11 pad.c@155.448,118.11
ROW3: J1.4 pad.c@156.845,116.713 S13.1 S14.1 S15.1 S16.1 U6.13 | length 135.6
  Top Layer w0.254: J1.4 119.38,96.266 119.38,92.986 119.529,92.837 133.963,92.837 134.112,92.688 134.112,84.074 ; S16.1@137.414,84.018 134.168,84.018 134.112,84.074 ; S14.1 134.183,59.38 134.112,59.309 ; S13.1 137.612,46.736 134.261,46.736 134.112,46.885 134.112,59.309 ; S15.1@137.668,71.572 134.183,71.572 134.112,71.501 ; 134.112,59.309 134.112,71.501 ; 134.112,71.501 134.112,84.074
  Bottom Layer w0.254: J1.4 119.507,116.437 119.656,116.586 156.718,116.586 pad.c@156.845,116.713
RST: pad.c@159.385,116.713 U2.2 U6.18 | length 31.6
  Bottom Layer w0.254: U2.2 pad.c@159.385,116.713
SCK: pad.c@163.83,118.618 U2.7 U6.26 | length 77.4
  Bottom Layer w0.254: pad.c@163.979,118.618 164.973,118.618 165.354,118.237 188.827,118.237 188.976,118.088 188.976,84.074 188.722,83.82 172.234,83.82 172.085,83.969 U2.7
SCL: P1.1 pad.c@159.893,125.095 U6.42 | length 22.7
  Bottom Layer w0.254: pad.c@159.893,125.095 159.893,127.105 160.042,127.254 160.274,127.254 160.528,127.508 160.528,128.629 160.677,128.778 164.189,128.778 164.338,128.927 164.338,140.313 164.487,140.462 166.221,140.462 166.37,140.611 P1.1
SDA1: P1.2 pad.c@159.385,125.095 U6.43 | length 20.7
  Bottom Layer w0.254: pad.c@159.385,125.222 159.385,127.486 159.534,127.635 159.871,127.635 160.02,127.784 160.02,129.137 160.169,129.286 163.681,129.286 163.83,129.435 P1.2
SDA2: pad.c@163.83,118.11 U2.8 U6.25 | length 70.2
  Bottom Layer w0.254: pad.c@163.83,118.11 164.465,117.475 187.938,117.475 188.087,117.326 188.087,85.239 187.938,85.09 U2.8
SWDCLK: C6.3 U6.37 | length 12.3
  Top Layer w0.254: U6.37 174.513,125.08 C6.3
SWDIO: C6.2 U6.34 | length 10.9
  Top Layer w0.254: U6.34 174.403,122.65 C6.2
pads on no net: CON1.0 U2. U2.4 U4.6
copper on no net:
  other v1: 201.056,123.462 201.056,127.862

## Text inside footprints (layer, text, board x,y; h text height)
P7: Top Overlay "6" at 173.101,134.239 h1.27; Top Overlay "5" at 173.101,131.699 h1.27; Top Overlay "2" at 163.957,134.239 h1.27; Top Overlay "1" at 164.465,131.699 h1.27